# EAGLE board FSK_v2 (EAGLE 6.5.0)
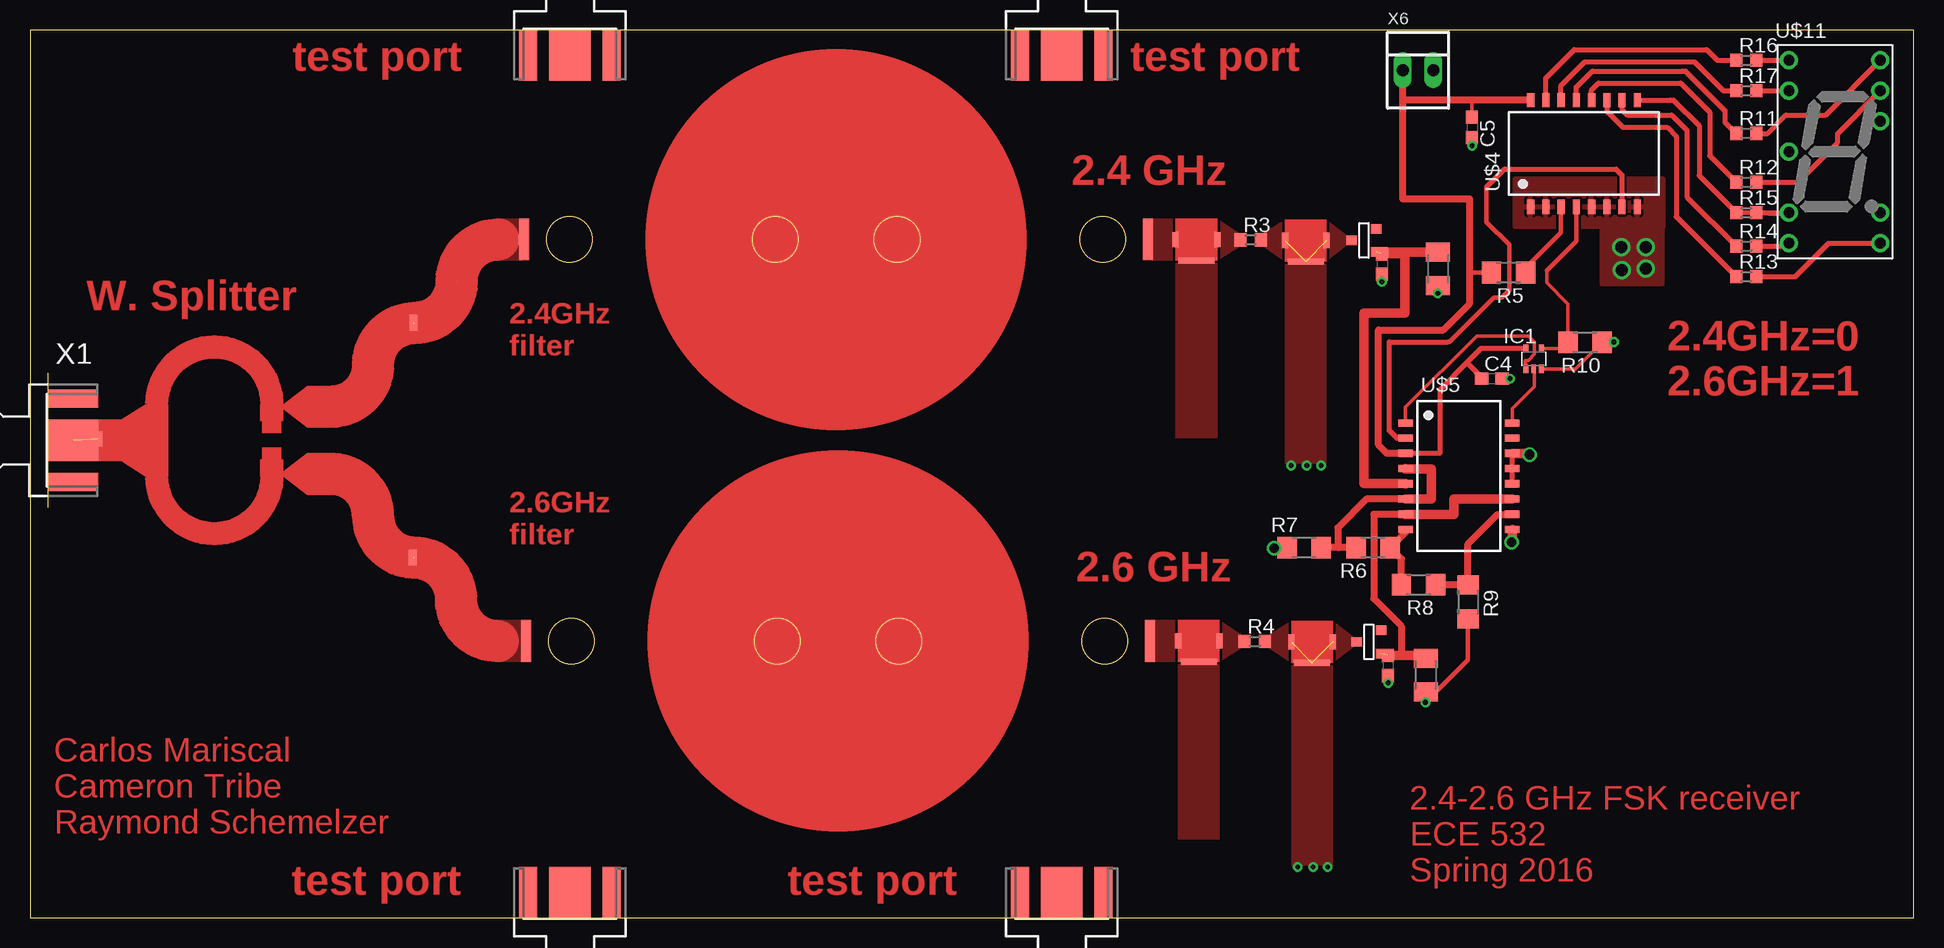
[diagram p0: board, top side]
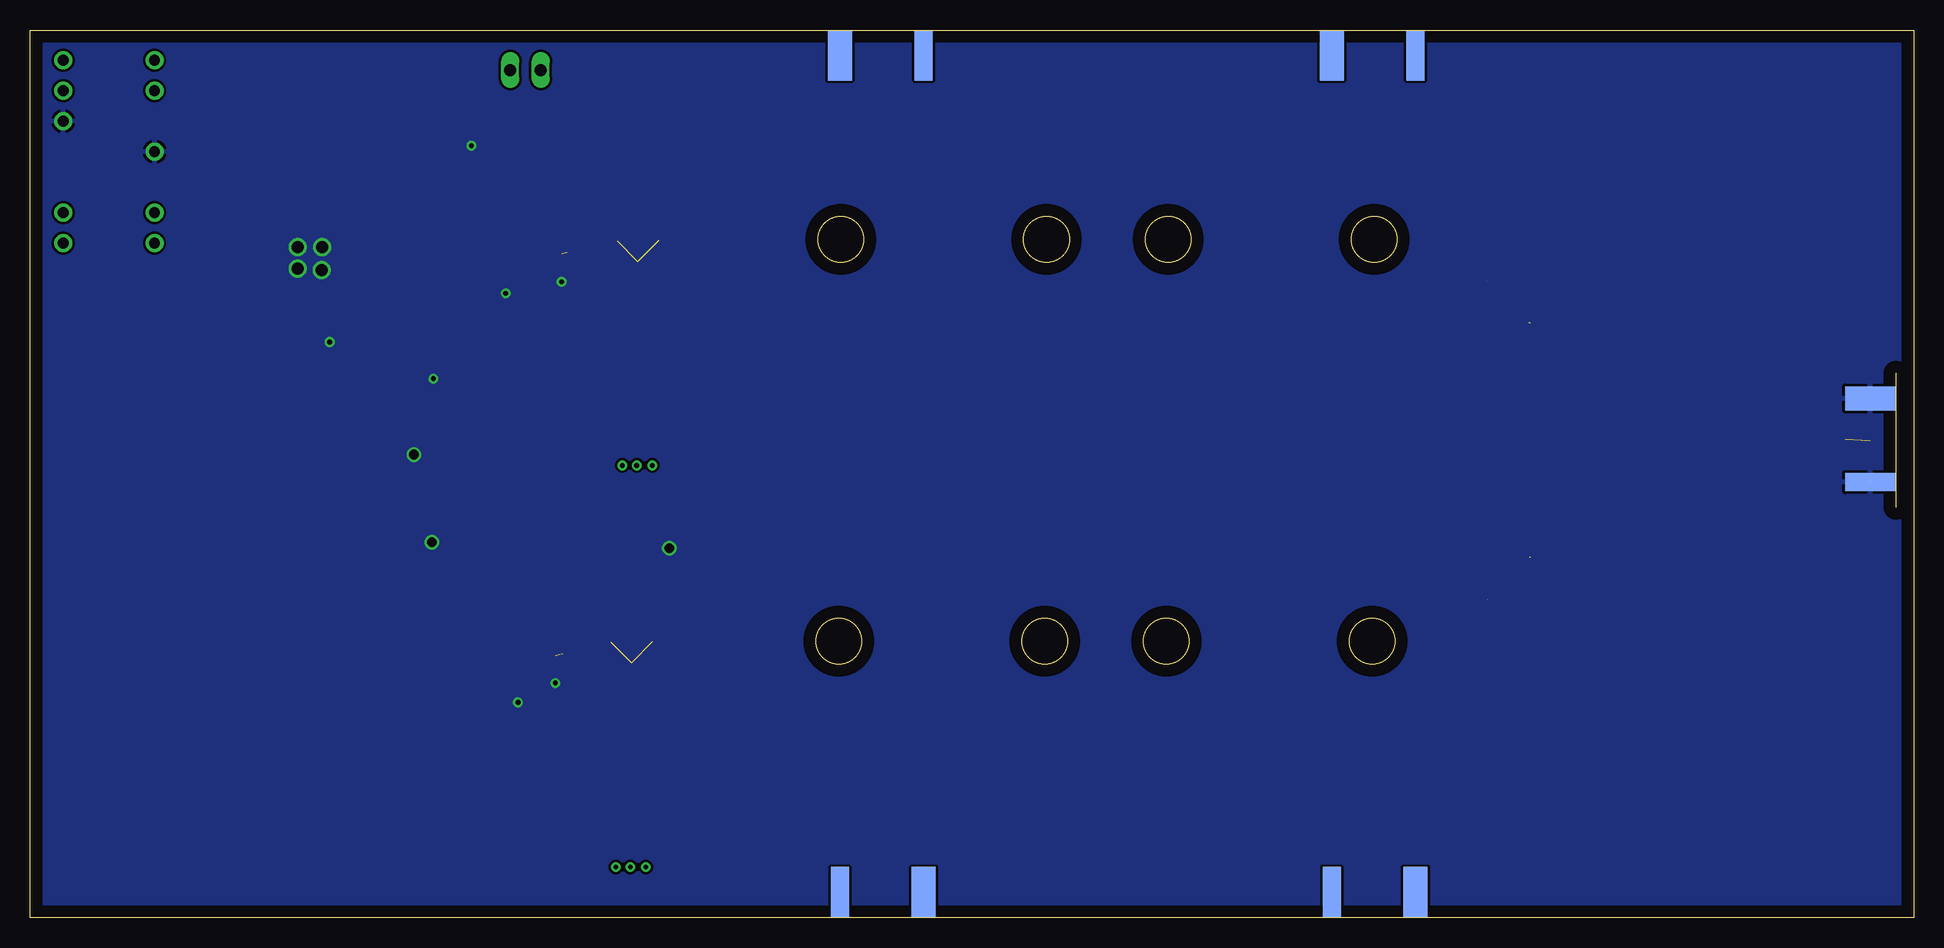
[diagram p1: board, bottom side, seen from below]

Size 157 x 74 mm. Coordinates in mm from the lower left corner, seen from the top.
Outline: 0,0 157,0 157,74 0,74 0,0
Copper layers (1*16): Top 0.035mm / dielectric 1.5mm / Bottom 0.035mm
Design rules "default": minimum track width 10mil, minimum drill 24mil, track to track 8mil, track to pad 8mil, pad to pad 8mil, via to via 8mil, smd to smd 8mil, copper to edge 40mil, drill to drill 8mil, minimum pad ring 10mil, minimum via ring 8mil, stop-mask expansion 4mil, vias tented up to drill 0mil, thermal gap 10mil

## Footprints (pad centres in the part's own frame; a part is rotated, then mirrored left to right if it is on the bottom)
TEE_TL1 = smd 3 x 0.5: T_B 0,-0.475 | smd 0.5 x 1.27: T_L -1.745,1.27; T_R 1.745,1.27
C0603 = smd 1.1 x 1: 1 -0.85,0; 2 0.85,0
1IN_PIPE_CAP = smd 0.8 x 3.49: IN -26,0; OUT 26,0
SC70-5 = smd 0.4 x 0.7: 1 -0.65,-0.85; 2 0,-0.85; 3 0.65,-0.85; 4 0.65,0.85; 5 -0.65,0.85
M1206 = smd 1.6 x 2: 1 -1.4,0; 2 1.4,0
R0603 = smd 1 x 1.1: 1 -0.85,0; 2 0.85,0
R1206 = smd 1.6 x 1.803: 1 -1.422,0; 2 1.422,0
WSPLITTER_2.5GHZ = smd 0.635 x 1.27: P$1 -9.743,-0.194; P$2 16.528,9.479; P$3 16.499,-10.092
HSMS-2850 = smd 0.787 x 0.889: A 0.025,-1.016; C 0.991,1.016; NC -0.94,1.016
CD54HC4511 = smd 1.2 x 0.6: 1 -4.445,3.175; 2 -4.445,1.905; 3 -4.445,0.635; 4 -4.445,-0.635; 5 -4.445,-1.905; 6 -4.445,-3.175; 7 -4.445,-4.445; 8 -4.445,-5.715; 9 4.445,-5.715; 10 4.445,-4.445; 11 4.445,-3.175; 12 4.445,-1.905; 13 4.445,-0.635; 14 4.445,0.635; 15 4.445,1.905; 16 4.445,3.175
TSM983ESE+T = smd 1.2 x 0.6: 1 -4.445,4.445; 2 -4.445,3.175; 3 -4.445,1.905; 4 -4.445,0.635; 5 -4.445,-0.635; 6 -4.445,-1.905; 7 -4.445,-3.175; 8 -4.445,-4.445; 9 4.445,-4.445; 10 4.445,-3.175; 11 4.445,-1.905; 12 4.445,-0.635; 13 4.445,0.635; 14 4.445,1.905; 15 4.445,3.175; 16 4.445,4.445
7S_DISPLAY = drill 0.9 pad 1.5: 1 -1.27,7.62; 2 -1.27,5.08; 3 -1.27,0; 4 -1.27,-5.08; 5 -1.27,-7.62; 6 6.35,-7.62; 7 6.35,-5.08; 8 6.35,2.54; 9 6.35,5.08; 10 6.35,7.62
J502-ND-142-0711-821/826 = smd 4.191 x 3.49: 1 2.115,0 | smd 4.191 x 1.5: G@1 2.115,3.495; G@2 2.115,-3.495 | smd 4.191 x 2 bottom: G@3 2.115,3.495 | smd 4.191 x 1.5 bottom: G@4 2.115,-3.495
22-23-2021 = drill 1 long: 1 -1.27,0; 2 1.27,0

## Placement (x,y rotation side)
2.4FIL  TEE_TL1  [TEE_TL1]  97.24,55.26 0 top
2.4TUNED  TEE_TL1  [TEE_TL1]  106.34,55.18 0 top
2.6FIL  TEE_TL1  [TEE_TL1]  97.42,21.79 0 top
2.6TUNED  TEE_TL1  [TEE_TL1]  106.87,21.71 0 top
C1  100 pF  [C0603]  112.7,54.49 270 top
C2  100 pF  [C0603]  113.19,21.01 270 top
C4  [C0603]  121.86,44.93 0 top
C5  [C0603]  120.2,65.88 270 top
FILTER1  2.4GHz  [1IN_PIPE_CAP]  67.19,56.54 0 top
FILTER2  2.6GHz  [1IN_PIPE_CAP]  67.35,23.06 0 top
IC1  74AUC1G32DCK  [SC70-5]  125.34,46.59 0 top
R1  10k  [M1206]  117.37,54.08 90 top
R2  10k  [M1206]  116.33,20.21 90 top
R3  [R0603]  101.75,56.49 0 top
R4  [R0603]  102.09,23.02 0 top
R5  10k  [R1206]  123.24,53.77 180 top
R6  4.7k  [R1206]  111.96,30.84 0 top
R7  4.7k  [R1206]  106.21,30.84 0 top
R8  4.7k  [R1206]  115.74,27.76 180 top
R9  4.7k  [R1206]  119.86,26.31 90 top
R10  10k  [R1206]  129.62,47.96 180 top
R11  [R0603]  143.06,65.37 0 top
R12  [R0603]  143.06,61.31 0 top
R13  [R0603]  143.06,53.44 0 top
R14  [R0603]  143.06,55.98 0 top
R15  [R0603]  143.06,58.77 0 top
R16  [R0603]  143.06,71.47 0 top
R17  [R0603]  143.06,68.93 0 top
U$1  WSPLITTER_2.5GHZ  [WSPLITTER_2.5GHZ]  15.43,40.1 0 top
U$2  HSMS-2850  [HSMS-2850]  111.2,56.49 270 top
U$3  HSMS-2850  [HSMS-2850]  111.6,23.01 270 top
U$4  CD54HC4511  [CD54HC4511]  128.25,63.7 90 top
U$5  TSM983ESE+T  [TSM983ESE+T]  119.1,36.8 0 top
U$11  7S_DISPLAY  [7S_DISPLAY]  147.89,63.85 0 top
X1  SMA-142-0711-821/826  [J502-ND-142-0711-821/826]  1.48,39.79 0 top
X2  SMA-142-0711-821/826  [J502-ND-142-0711-821/826]  45,0 90 top
X3  SMA-142-0711-821/826  [J502-ND-142-0711-821/826]  45,74 270 top
X4  SMA-142-0711-821/826  [J502-ND-142-0711-821/826]  86,0 90 top
X5  SMA-142-0711-821/826  [J502-ND-142-0711-821/826]  86,74 270 top
X6  22-23-2021  [22-23-2021]  115.7,70.65 0 top

## Library data of the parts
2.4FIL 2.4TUNED 2.6FIL 2.6TUNED FILTER1 FILTER2 U$1-U$5 U$11 = ECE532_Parts
C1 C2 C4 C5 R1-R17 = rcl
IC1 = 74xx-little-de
X1-X5 = con-coax; MF: JOHNSON COMPONENTS; MPN: 142-0711-821; OC_FARNELL: 1019328; OC_NEWARK: 16F3627
X6 = con-molex; MF: MOLEX; MPN: 22-23-2021; OC_FARNELL: 1462926; OC_NEWARK: 25C3832

## Nets
2.4_OUT: C1.1 R1.2 U$2.C U$5.5
2.4FIL: 2.4FIL.T_B 2.4FIL.T_L 2.4FIL.T_R FILTER1.OUT R3.1
2.4GHZ: FILTER1.IN U$1.P$2
2.4TUNED: 2.4TUNED.T_B 2.4TUNED.T_L 2.4TUNED.T_R R3.2 U$2.A
2.6_OUT: C2.1 R2.2 U$3.C U$5.7 U$5.11
2.6FIL: 2.6FIL.T_B 2.6FIL.T_L 2.6FIL.T_R FILTER2.OUT R4.1
2.6GHZ: FILTER2.IN U$1.P$3
2.6TUNED: 2.6TUNED.T_B 2.6TUNED.T_L 2.6TUNED.T_R R4.2 U$3.A
GND1: C1.2 C2.2 C4.2 C5.2 IC1.3 R1.1 R2.1 R7.1 R9.1 R10.1 U$4.1 U$4.2 U$4.5 U$4.6 U$4.8 U$5.9 U$5.12 U$5.13 U$5.14 U$11.3 U$11.8 X1.G@1 X1.G@2 X1.G@3 X1.G@4
N$1: IC1.4 R10.2 U$4.4
N$2: IC1.1 U$5.1
N$3: R11.2 U$11.10
N$4: R12.2 U$11.9
N$5: U$1.P$1 X1.1
N$6: U$4.7 U$5.2
N$7: R13.2 U$11.6
N$8: IC1.2 U$5.16
N$9: R8.1 R9.2 U$5.10
N$10: R6.2 R8.2 U$5.8
N$11: R6.1 R7.2 U$5.4 U$5.6
N$12: R5.1 U$4.3
N$13: R14.2 U$11.5
N$14: R15.2 U$11.4
N$15: R16.2 U$11.1
N$16: R17.2 U$11.2
N$17: R11.1 U$4.13
N$18: R12.1 U$4.12
N$19: R13.1 U$4.11
N$20: R14.1 U$4.10
N$21: R15.1 U$4.9
N$22: R16.1 U$4.15
N$23: R17.1 U$4.14
VCC: C4.1 C5.1 IC1.5 R5.2 U$4.16 U$5.3 X6.1

## Tracks (layer width: path | path; a pad name or v marks a point on that pad's centre or on a via)
2.4_OUT  (1 unrouted)
  Top 0.8: U$2.C 115.57,55.5 R1.2 | C1.1 114.6,55.34 114.6,50.4 111.2,50.4 111.2,36.2 114.66,36.2 U$5.5
2.4FIL
  pour Top (no thermals): 95.49,54.79 98.98,54.79 98.98,39.99 95.49,39.99
  pour Top (no thermals): 93.51,58.28 95.51,58.28 95.51,54.79 93.51,54.79
  pour Top (no thermals): 98.97,54.79 98.97,58.28 100.97,56.94 100.97,56.04
2.4GHZ  (2 unrouted)
  Top 3.49: 35.56,53.06 arc-90 32.07,49.57 | 35.56,53.04 arc-90 39.05,56.53
  pour Top (no thermals): 38.84,58.28 41.03,58.28 41.03,54.79 38.84,54.79
2.4TUNED  (via drill 0.4)  (2 unrouted)
  other vias: 105.13,37.69 106.43,37.69 107.63,37.69
  pour Top (no thermals): 104.59,58.19 104.59,54.7 102.59,56.05 102.59,56.95
  pour Top (no thermals): 108.07,54.72 108.07,58.21 110.07,56.66 110.07,56.26
  pour Top (no thermals): 104.59,37.85 104.59,54.71 108.08,54.71 108.08,37.85
2.6_OUT  (1 unrouted)
  Top 0.6: U$5.7 112,33.62 112,26.6 114.3,24.3 114.3,22.06 114.5,21.86
  Top 0.8: U$5.7 118.7,33.62 118.7,34.9 U$5.11 | C2.1 114.5,21.86 116.33,21.86 R2.2
2.6FIL
  pour Top (no thermals): 95.67,21.32 99.16,21.32 99.16,6.52 95.67,6.52
  pour Top (no thermals): 93.69,24.8 95.69,24.8 95.69,21.31 93.69,21.31
  pour Top (no thermals): 99.16,21.31 99.16,24.8 101.16,23.46 101.16,22.56
2.6GHZ  (2 unrouted)
  Top 3.49: 32.01,30.02 arc-90 35.5,26.53 | 38.99,23.05 arc-90 35.5,26.54
  pour Top (no thermals): 38.92,24.8 41.11,24.8 41.11,21.31 38.92,21.31
2.6TUNED  (via drill 0.4)  (2 unrouted)
  other vias: 105.66,4.21 106.96,4.21 108.16,4.21
  pour Top (no thermals): 105.12,24.71 105.12,21.22 103.12,22.57 103.12,23.47
  pour Top (no thermals): 108.61,21.24 108.61,24.73 110.61,23.18 110.61,22.78
  pour Top (no thermals): 105.13,4.37 105.13,21.23 108.62,21.23 108.62,4.37
GND1  (via drill 0.4, 0.8, 1)  (2 unrouted)
  Top 0.305: C4.2 v123.38,44.93 | v132.02,47.97 132,47.96 R10.1 128.82,45.74 IC1.3 | C5.2 v120.2,64.36
  Top 0.381: R9.1 119.86,21.48 v116.33,17.95
  Top 0.4: U$5.12 U$5.13
  Top 0.406: C1.2 112.68,53.64 v112.68,53 | v117.34,52.05 117.37,52.25 R1.1 | v113.2,19.55 113.19,19.55 C2.2 | v116.33,17.95 116.33,17.95 R2.1 | U$5.13 U$5.14
  Top 0.6: v103.7,30.8 104.75,30.8 R7.1
  Top 0.8: U$5.14 125,38.7 v125,38.6 | v123.5,31.3 123.55,31.3 U$5.9
  other vias: 134.68,55.9 132.7,54 132.65,55.9 134.68,54.12
  pour Bottom: -4,79 180,79 180,-13 -4,-13
  pour Top: 123.8,61.6 136.11,61.6 136.11,57.6 123.8,57.6
  pour Top: 131,57.88 136.08,57.88 136.08,52.8 131,52.8
N$1
  Top 0.305: IC1.4 127.68,47.44 R10.2 128.2,51.15 126.43,52.93 126.43,53.92 126.42,53.92
  Top 0.381: 126.42,53.92 128.9,56.4 U$4.4
N$2
  Top 0.305: U$5.1 114.66,42.56 120.59,48.48 124.9,48.48 125.38,47.99 125.38,46.98 124.9,46.45 124.65,46.45 124.65,45.78 IC1.1
N$3
  Top 0.406: R11.2 144.84,65.37 146.37,66.9 149.67,66.9 U$11.10
N$4
  Top 0.406: R12.2 147.38,61.31 150.69,64.61 150.69,65.37 U$11.9
N$5  (1 unrouted)
N$6
  Top 0.381: 118.2,48 118.3,48 122,51.7 122.7,51.7 123.3,52.3 123.3,56.1 121.4,58 121.4,60.9
  Top 0.4: U$5.2 113.93,39.97 113.3,40.6 113.3,48 118.2,48 | 121.4,60.9 122.9,62.4 132.2,62.4 132.7,61.9 U$4.7 | U$4.7
N$7
  Top 0.406: R13.2 147.13,53.44 149.92,56.23 U$11.6
N$8
  Top 0.305: U$5.16 123.55,42.43 125.41,44.29 125.41,45.67 IC1.2
N$9
  Top 0.6: R8.1 119.83,27.76 R9.2 119.86,31.16 122.3,33.6 123.53,33.6 U$5.10
N$10
  Top 0.6: R6.2 | U$5.8 114.66,32.12 R6.2 | R8.2 114.32,29.9 R6.2
N$11
  Top 0.6: R6.1 109.1,30.84 | 109.1,30.84 R7.2 | U$5.6 111.39,34.89 109,32.5 109,30.94 109.1,30.84
  Top 0.8: U$5.6 116.8,34.89 116.8,37.4 114.66,37.4 U$5.4
N$12
  Top 0.381: R5.1 124.67,54.16 127.6,57.1 127.6,59.24 U$4.3
N$13
  Top 0.406: R14.2 146.37,55.98 U$11.5
N$14
  Top 0.406: R15.2 U$11.4
N$15
  Top 0.406: R16.2 U$11.1
N$16
  Top 0.406: R17.2 U$11.2
N$17
  Top 0.4: 137.73,70.58 137.99,70.58 141.29,67.28 141.29,66.3 R11.1
  Top 0.406: U$4.13 128.89,69.23 130.24,70.58 137.73,70.58
N$18
  Top 0.4: 137.6,69.56 140.02,67.15 140.02,63.51 R12.1
  Top 0.406: U$4.12 130.16,68.98 130.75,69.56 137.6,69.56
N$19
  Top 0.4: U$4.11 131.43,67.23 132.78,65.88 136.46,65.88 137.22,65.12 137.22,58.43 R13.1
N$20
  Top 0.4: U$4.10 132.7,67.36 133.16,66.9 136.84,66.9 138.11,65.63 138.11,60.08 R14.1
N$21
  Top 0.4: 136.73,68.15 136.99,68.15 139.13,66.01 139.13,61.86 R15.1
  Top 0.406: U$4.9 136.73,68.15 | 146.24,58.64 R15.1
N$22
  Top 0.4: 128.71,72.36 139.76,72.36 140.65,71.47 142.18,71.47 R16.1
  Top 0.406: U$4.15 126.35,69.99 128.71,72.36
N$23
  Top 0.4: U$4.14 127.62,69.36 129.6,71.34 138.75,71.34 141.16,68.93 R17.1
VCC
  Top 0.305: C5.1 120.2,68.15
  Top 0.381: R5.2 120.21,53.77 120,53.56
  Top 0.4: IC1.5 120.94,47.44 119.76,46.26 117.5,44 117.5,38.7 U$5.3 | U$5.3
  Top 0.406: C4.1 121.01,45.01 119.76,46.26
  Top 0.6: U$5.3 113.1,38.7 112.4,39.4 112.4,49 117.8,49 120,51.2 120,53.56 120,59.9 114.43,59.9 114.43,68.15 | U$4.16 120.2,68.15 114.43,68.15 | 114.43,68.15 X6.1

## Text on the board
Top: test port | test port | 2.4 GHz | W. Splitter | 2.4GHz / filter | 2.4GHz=0 / 2.6GHz=1 | 2.6GHz / filter | 2.6 GHz | Carlos Mariscal / Cameron Tribe / Raymond Schemelzer | 2.4-2.6 GHz FSK receiver / ECE 532 / Spring 2016 | test port | test port